# Altium PCB FrontV1.1.PcbDoc
Units mil, origin at the board's own origin, x right, y up, seen from the top; angles counter-clockwise.
Board outline 3149.61 x 3149.61 mil, 2 copper layers (Top Layer, Bottom Layer); 35 components, 39 nets, 152 pads, 15 vias.
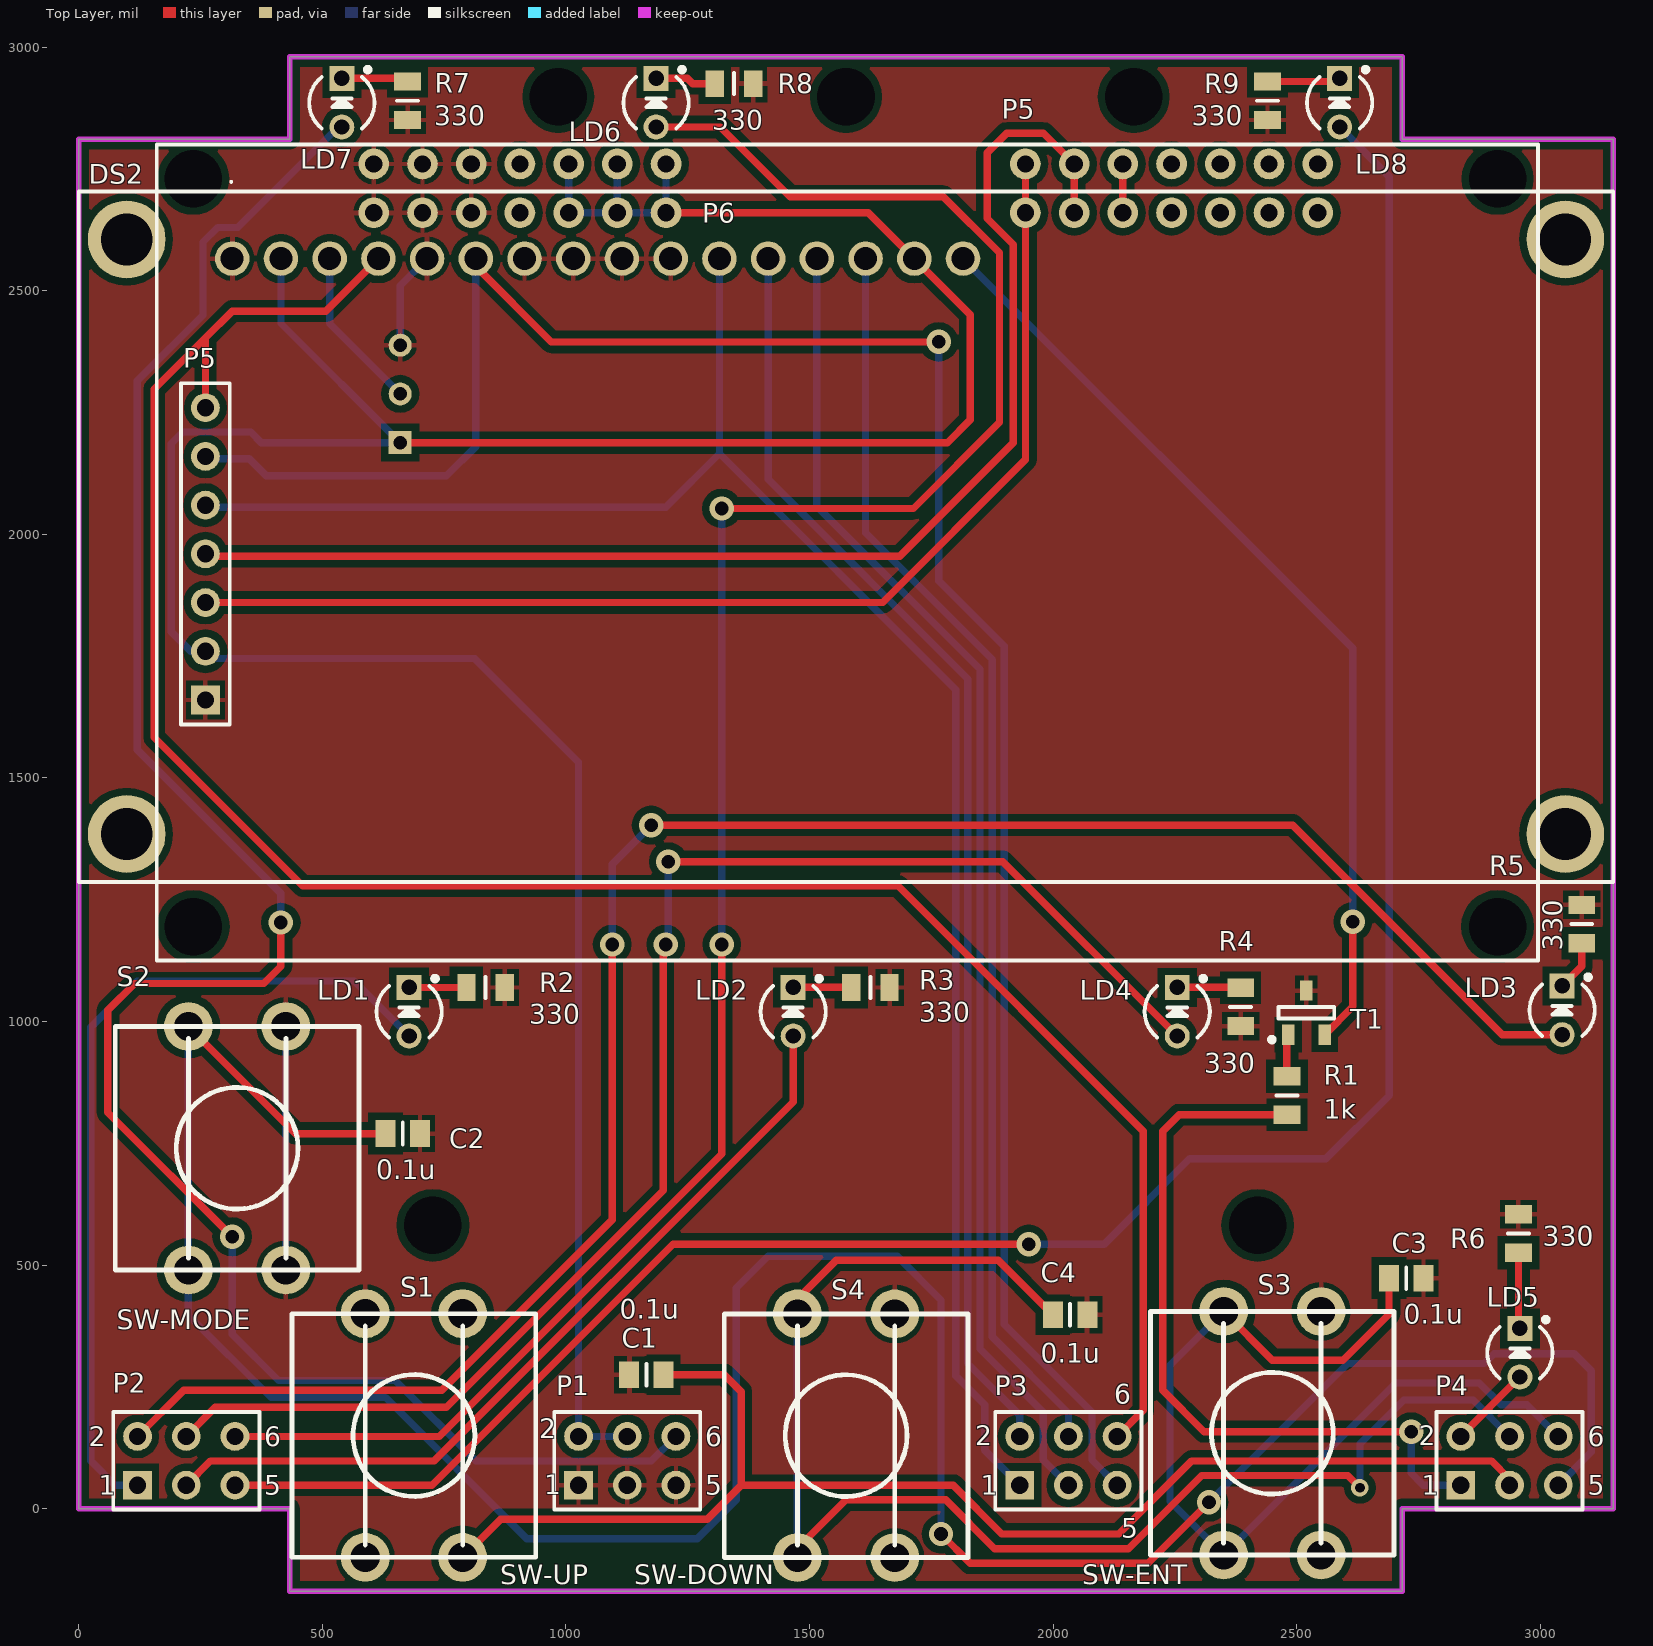
[diagram p0: Top Layer view]
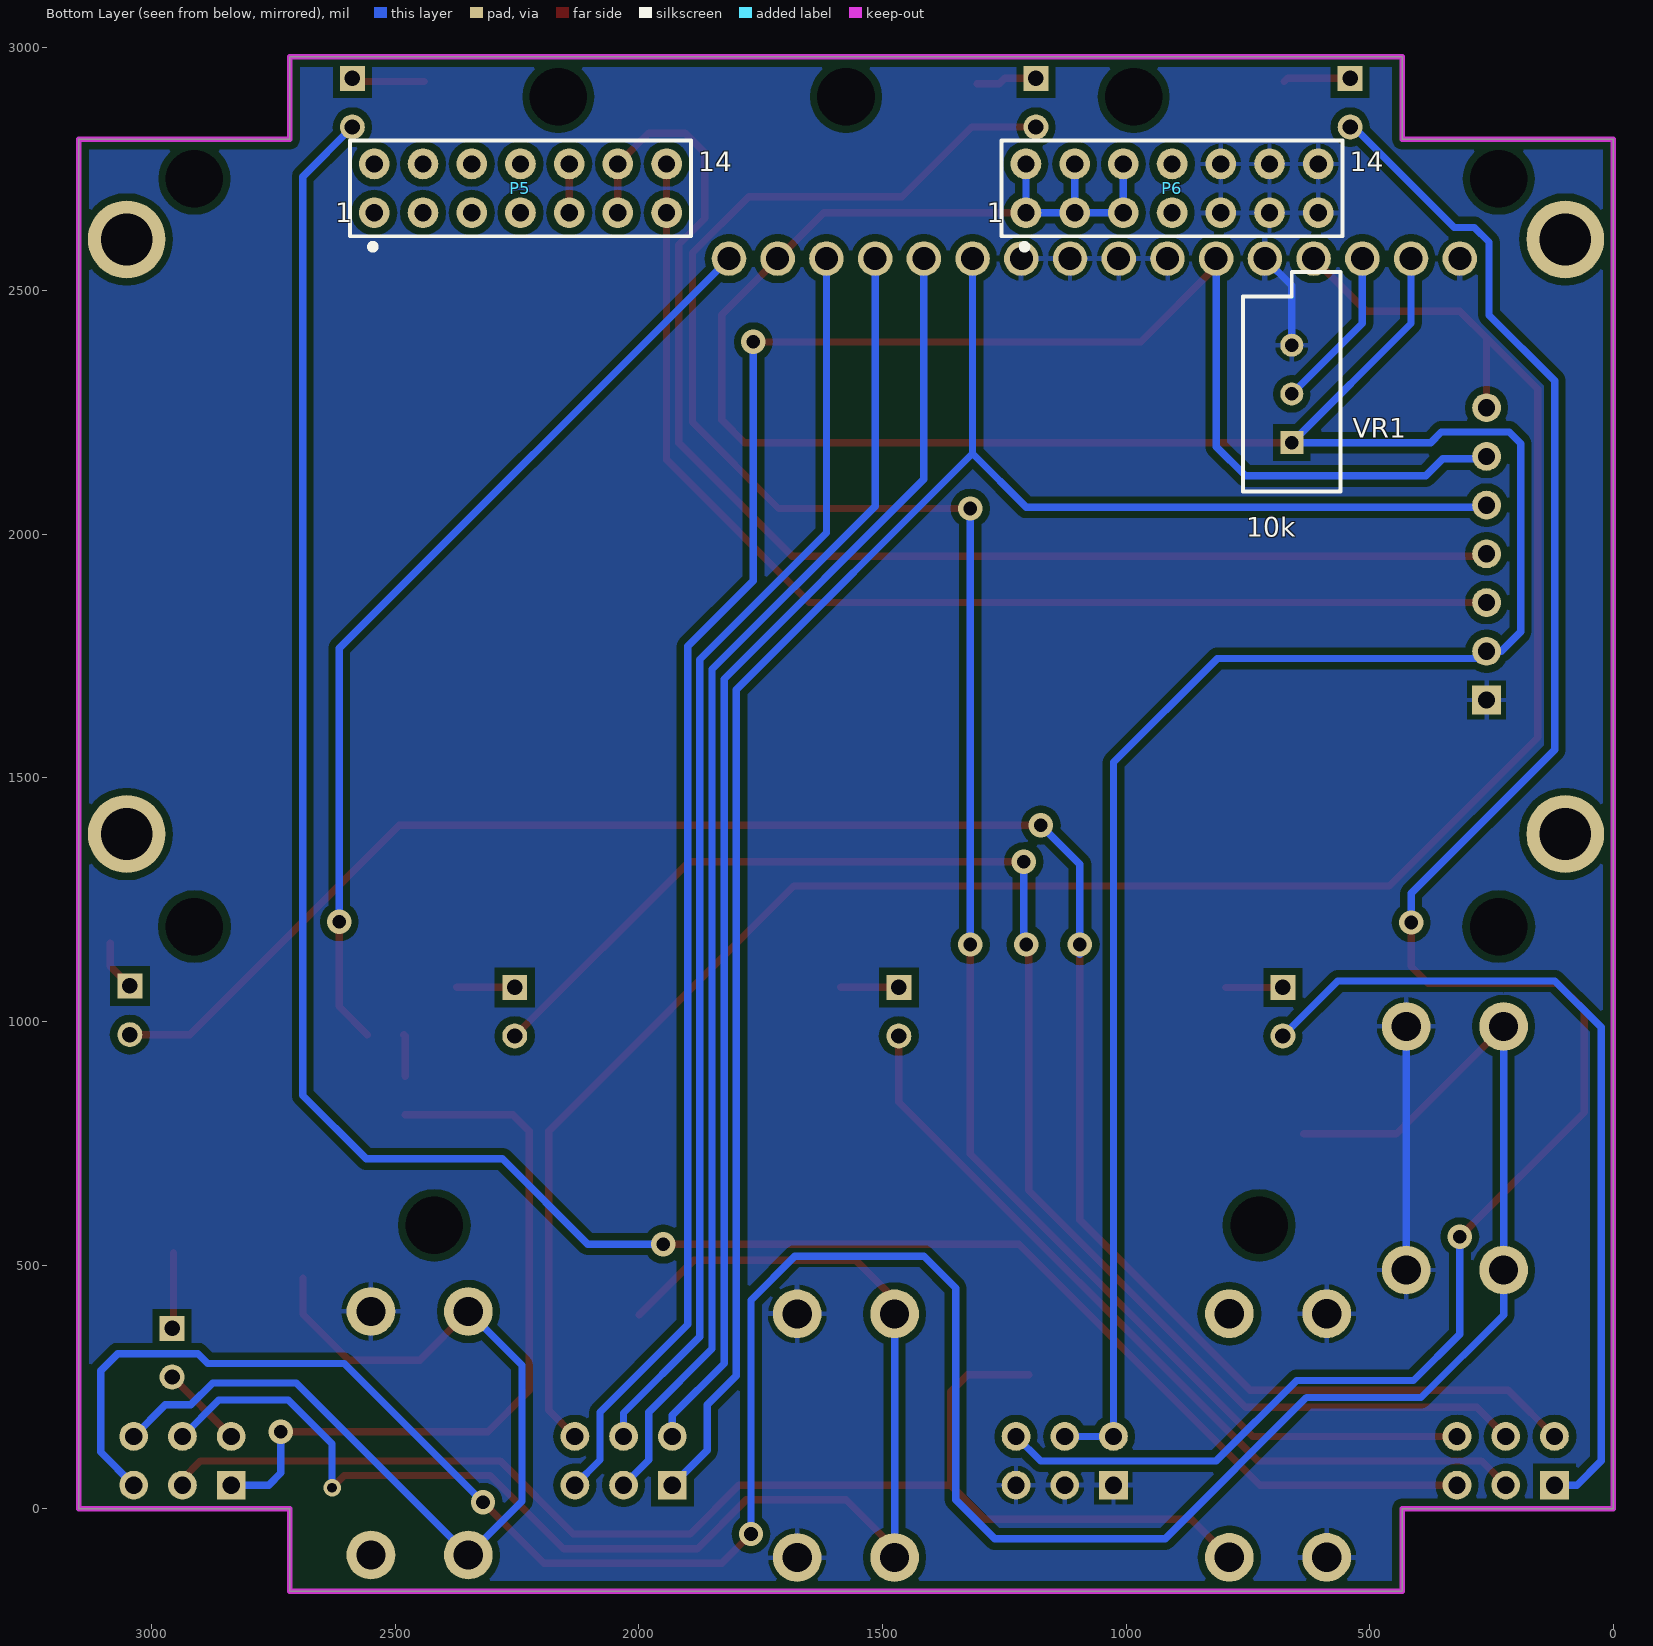
[diagram p1: Bottom Layer view, seen from below]
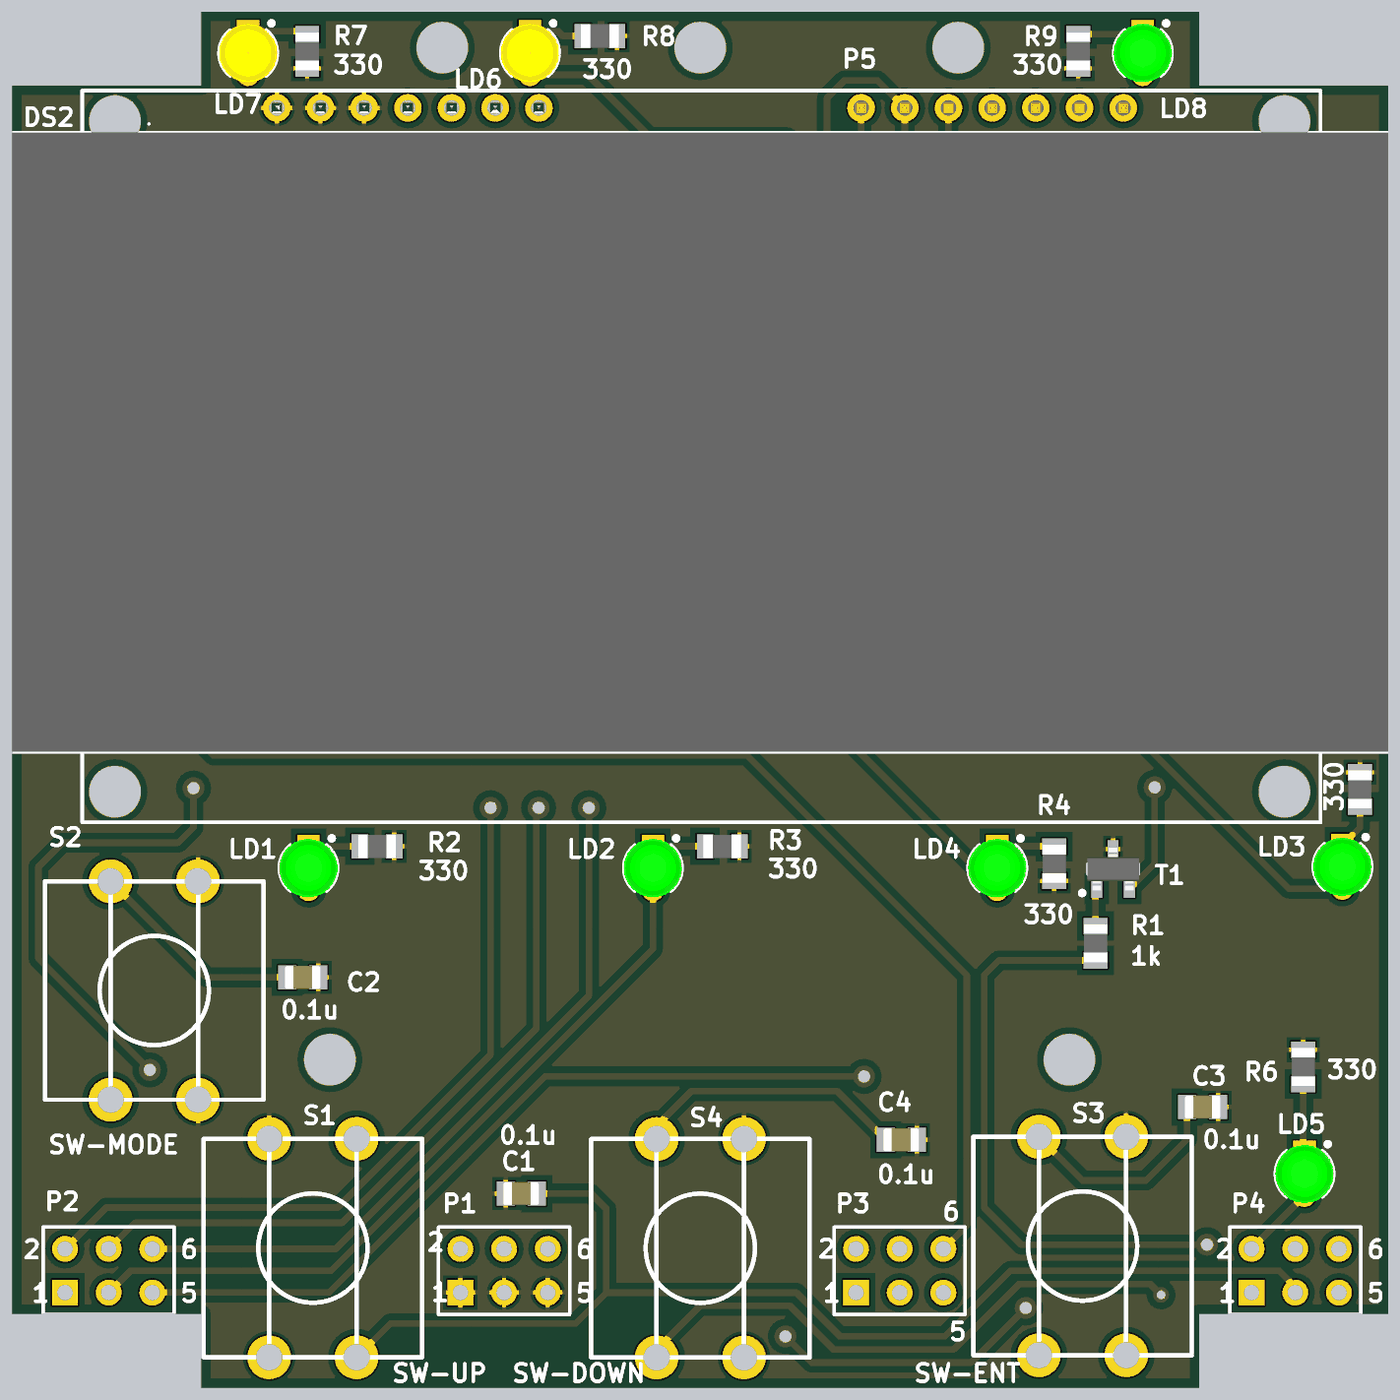
[diagram p2: 3D render of the assembled board from above, using the file's embedded part models]

## Layer stack, top to bottom
Top Solder: solder mask 0.4, Solder Resist, Dk 3.5
Top Layer: signal copper 1.4
Dielectric 1: dielectric 12.6, FR-4, Dk 4.8
Bottom Layer: signal copper 1.4
Bottom Solder: solder mask 0.4, Solder Resist, Dk 3.5

## Board outline
0,0 0,2811.02 433.07,2811.02 433.07,2980.31 2716.54,2980.31 2716.54,2811.02 3149.61,2811.02 3149.61,0 2716.54,0 2716.54,-169.29 433.07,-169.29 433.07,0

## Design rules (kind name [scope] priority, off if disabled: settings)
Clearance [All] p1: gap=10 ignorepadtopadclearanceinfootprint=FALSE
ComponentClearance [All] p1 off: gap=10 collisioncheckmode=3 verticalgap=10 showdistances=FALSE
PolygonConnect [All] p1: connectstyle=Relief reliefconductorwidth=10 reliefentries=4 polygonreliefangle="90 Angle" airgapwidth=10
RoutingVias [All] p1: holewidth=28 width=50 viastyle="Through Hole" minholewidth=28 minwidth=50 maxholewidth=28 maxwidth=50
SolderMaskExpansion [All] p1: expansion=4
Width [All] p1: maxlimit=300 minlimit=8 preferedwidth=10
29 further rules are at their usual default settings.

## Components (designator, comment, footprint, x,y, rotation, side; value= is the part's Value field where it differs from the comment)
C1 "0.1u" CAPC2012X135N 1165,275 r0 top value=100nF
C2 "0.1u" CAPC2012X135N 665,770 r180 top value=100nF
C3 "0.1u" CAPC2012X135N 2724.8,473.19 r180 top value=100nF
C4 "0.1u" CAPC2012X135N 2034.8,398.19 r180 top value=100nF
DS2 "HDM16216L-5-L30S" HDM16216L5L30S 315,2566.02 r0 top locked (schematic designator DS1)
LD1 "Green" LED_3MM_GREEN_1C-2A 678.07,1020.31 r270 top (schematic designator LD5)
LD2 "Green" LED_3MM_GREEN_1C-2A 1466.4,1020.31 r270 top
LD3 "Green" LED_3MM_GREEN_1C-2A 3044.8,1023.19 r270 top (schematic designator LD5)
LD4 "Green" LED_3MM_GREEN_1C-2A 2254.74,1020.31 r270 top
LD5 "Green" LED_3MM_GREEN_1C-2A 2958.07,320.31 r270 top
LD6 "Yellow" LED_3MM_YELLOW_1C-2A 1185,2886.02 r270 top
LD7 "Yellow" LED_3MM_YELLOW_1C-2A 540,2886.02 r270 top
LD8 "Green" LED_3MM_GREEN_1C-2A 2588.07,2886.02 r270 top (schematic designator LD5)
P1 "3X2" HDR2X3 1025.83,48.43 r0 top locked
P2 "3X2" HDR2X3 120.67,48.43 r0 top locked
P3 "3X2" HDR2X3 1931.34,48.43 r0 top locked
P4 "3X2" HDR2X3 2836.85,48.43 r0 top locked
P5 "7X2" COMATEL_389.0358.1.14.400 2243.07,2710.31 r180 bottom
P5 "Header 7" HDR1X7 260,1660 r90 top
P6 "7X2" COMATEL_389.0358.1.14.400 905.51,2710.31 r180 bottom
R1 "1k" RESC2012X60N 2479.8,848.19 r90 top
R2 "330" RESC2012X60N 835,1070 r0 top value=1k (schematic designator R1)
R3 "330" RESC2012X60N 1625,1070 r180 top value=1k (schematic designator R1)
R4 "330" RESC2012X60N 2385,1030 r90 top value=1k (schematic designator R1)
R5 "330" RESC2012X60N 3085,1200 r90 top value=1k (schematic designator R1)
R6 "330" RESC2012X60N 2955,565 r90 top value=1k (schematic designator R1)
R7 "330" RESC2012X60N 675,2890 r90 top value=1k (schematic designator R1)
R8 "330" RESC2012X60N 1345,2925 r180 top value=1k (schematic designator R1)
R9 "330" RESC2012X60N 2440,2890 r90 top value=1k (schematic designator R1)
S1 "SW-UP" SW_PB1 588.32,400.33 r270 top
S2 "SW-MODE" SW_PB1 424.75,489.99 r90 top
S3 "SW-ENT" SW_PB1 2549.75,-95.01 r90 top
S4 "SW-DOWN" SW_PB1 1674.75,-100.01 r90 top
T1 "MMBT3906LT1G" SOT95P240X110-3N 2519.8,1018.19 r90 top
VR1 "10k" VR5 659.8,2288.19 r90 bottom value=100k

## Footprints (in the part's own frame and the unit in brackets; to place one, negate y for a bottom-side part, rotate by r counter-clockwise, add the part's x,y. Pads: shape width x height; smd on the part's side, far side on the other; paste and mask are expansions set on the pad)
CAPC2012X135N [mm] "Chip Capacitor, Body 2.0x1.25mm, IPC Medium Density"
  rect 1.05x1.4 smd: 1(-0.9,0) 2(0.9,0)
  silkscreen extent 0,-0.58 0,0.58, body extent -1.05,-0.67 1.05,0.68, height 1.25
COMATEL_389.0358.1.14.400 [mm] "14 Contacts - Pitch 2.54mm - Dual Row Straight Strip Header - Insulator 1.7mm"
  round 1.6 hole 0.9: 1(-7.62,-1.27) 2(-7.62,1.27) 3(-5.08,-1.27) 4(-5.08,1.27) 5(-2.54,-1.27) 6(-2.54,1.27) 7(0,-1.27) 8(0,1.27) 9(2.54,-1.27) 10(2.54,1.27) 11(5.08,-1.27) 12(5.08,1.27) 13(7.62,-1.27) 14(7.62,1.27)
  silkscreen extent -8.89,-3.2 8.89,2.5, body extent -8.89,-3 8.89,2.5, height 8
HDM16216L5L30S [mm]
  round 1.8 hole 1.2: 1(0,0) 2(2.54,0) 3(5.08,0) 4(7.62,0) 5(10.16,0) 6(12.7,0) 7(15.24,0) 8(17.78,0) 9(20.32,0) 10(22.86,0) 11(25.4,0) 12(27.94,0) 13(30.48,0) 14(33.02,0) 15(35.56,0) 16(38.1,0)
  round 4.05 hole 2.7: MH1(-5.5,1) MH2(-5.5,-30) MH3(69.5,-30) MH4(69.5,1)
  silkscreen extent -8,-32.5 72,4.05, body extent -8,-32.5 72,3.5, height 14.6
HDR1X7 [mm] "Connector; Header; 7 Position"
  rect 1.5x1.5 hole 0.9: 1(0,0)
  round 1.5 hole 0.9: 2(2.54,0) 3(5.08,0) 4(7.62,0) 5(10.16,0) 6(12.7,0) 7(15.24,0)
  silkscreen extent -1.27,-1.27 16.51,1.27
HDR2X3 [mm] "Connector; Header; 3x2 Position"
  rect 1.5x1.5 hole 0.9: 1(0,0)
  round 1.5 hole 0.9: 2(0,2.54) 3(2.54,0) 4(2.54,2.54) 5(5.08,0) 6(5.08,2.54)
  silkscreen extent -1.27,-1.27 6.35,3.81
LED_3MM_GREEN_1C-2A [mm] "LED, Green, Body Dia. 3.43 mm, Pin spacing 2.54mm"
  rect 1.3x1.3 hole 0.8: 1(-1.27,0)
  round 1.3 hole 0.8: 2(1.27,0)
  silkscreen extent -1.85,-1.7 1.34,1.7, body extent -1.71,-1.71 1.72,1.72, height 9.85
LED_3MM_YELLOW_1C-2A [mm] "LED, Red, Body Dia. 3.43 mm, Pin spacing 2.54mm"
  rect 1.3x1.3 hole 0.8: 1(-1.27,0)
  round 1.3 hole 0.8: 2(1.27,0)
  silkscreen extent -1.85,-1.7 1.34,1.7, body extent -1.71,-1.71 1.72,1.72, height 9.85
RESC2012X60N [mm] "Chip Resistor, EIA 0805, Metric 2012, Body 2.0x1.2mm, IPC Medium Density"
  rect 0.95x1.4 smd: 1(-1,0) 2(1,0)
  silkscreen extent 0,-0.55 0,0.55, body extent -1.1,-0.67 1.1,0.68, height 0.6
SOT95P240X110-3N [mm] "SOT23 3-Leads, Pitch 0.95mm - Body 1.3x2.9mm, IPC Medium Density"
  rect 1.05x0.65 smd: 1(-1.15,0.95) 2(-1.15,-0.95) 3(1.15,0)
  silkscreen extent -1.52,-1.45 0.3,1.92, body extent -1.25,-1.5 1.25,1.5, height 1.1
SW_PB1 [mil]
  round 100 hole 60: 1(0.01,-0.25) 1(500.01,-0.25) 2(0.01,199.75) 2(500.01,199.75)
  silkscreen extent 0,-150 500,350
VR5 [mm] "Thru-Hole; 3 Leads"
  rect 1.2x1.2 hole 0.7: 1(-2.54,0)
  round 1.2 hole 0.7: 2(0,0) 3(2.54,0)
  silkscreen extent -5.08,-2.54 6.35,2.54

## Part data
C1 C2 C3 C4: library part CC0805_100NF_50V_10%_X7R, "0092-0004-8", Case=0805, Manufacturer=GENERIC, Manufacturer1 ComponentHeight=1.35mm, Manufacturer1 Example=EPCOS, Manufacturer1 Part Number=B37941K5104K62, Tolerance=±10%, Voltage=50V, Author="CERN DEM JLC", Component Type=Standard, CreateDate=3/12/2550, HelpURL=\\cern.ch\dfs\Applications\Altium\Datasheets\CC0805_X7R_EPCOS.pdf, LatestRevisionDate=3/12/2550, Manufacturer Part Number=CC0805_100NF_50V_10%_X7R, Mounted=Yes, Part Description="SMD Multilayer Chip Ceramic Capacitor", Part Number=CC0805_100NF_50V_10%_X7R, Pin Count=2, SMD=Yes, Socket=No, Status=Preferred, Table="Capacitors SMD", TC=X7R
DS2: "Display", Manufacturer_Name=Hantronix, Datasheet Link=https://componentsearchengine.com//HDM16216L-5-L30S.pdf, Height=14.5mm, Manufacturer_Part_Number=HDM16216L-5-L30S, Mouser Part Number=HDM16216L-5-L30S, Mouser Price/Stock=https://www.mouser.co.uk/ProductDetail/Hantronix/HDM16216L-5-L30S?qs=NSR9MB9Qqxa1fDGN5rUO%252Bw%3D%3D
LD1 LD2 LD3 LD4 LD5 LD8: library part LED_AVAGO_HLMP-1790, "LED Green 1C 2A", Manufacturer="AVAGO TECHNOLOGIES", Manufacturer Part Number=HLMP-1790, Author="CERN DEM JLC", Color=Green, ComponentHeight=6.35mm(min), Component Type=Standard, CreateDate=12/6/2551, HelpURL=\\cern.ch\dfs\Applications\Altium\Datasheets\LED_AVAGO_HLMP-1790.pdf, LatestRevisionDate=17/3/2553, Mounted=Yes, PackageDescription="LED, Green, Body Dia. 3.43 mm, Pin spacing 2.54mm", Part Description="3mm Green LED", Part Number=LED_AVAGO_HLMP-1790, Pin Count=2, SMD=No, Socket=No, Table="LEDs & Displays"
LD6 LD7: library part LED_AVAGO_HLMP-1719, "LED Yellow 1C 2A", Manufacturer="AVAGO TECHNOLOGIES", Manufacturer Part Number=HLMP-1719, Author="CERN DEM JLC", Color=Yellow, ComponentHeight=6.35mm(min), Component Type=Standard, CreateDate=12/6/2551, HelpURL=\\cern.ch\dfs\Applications\Altium\Datasheets\LED_AVAGO_HLMP-1719.pdf, LatestRevisionDate=17/3/2553, Mounted=Yes, PackageDescription="LED, Yellow, Body Dia. 3.43 mm, Pin spacing 2.54mm", Part Description="3mm Yellow LED", Part Number=LED_AVAGO_HLMP-1719, Pin Count=2, SMD=No, Socket=No, Table="LEDs & Displays"
P1 P2 P3 P4: library part "Header 3X2", "Header, 3-Pin, Dual row", LatestRevisionDate=17-Jul-2002, LatestRevisionNote="Re-released for DXP Platform.", Publisher="Altium Limited"
P5 P6: library part COMATEL_389.0358.1.14.400
P5: "Header, 7-Pin", LatestRevisionDate=17-Jul-2002, LatestRevisionNote="Re-released for DXP Platform.", Publisher="Altium Limited"
R1 R2 R3 R4 R5 R6 R7 R8 R9: library part R0805_1K_1%_0.125W_100PPM, "Resistor - 1%", Case=0805, Manufacturer=GENERIC, Manufacturer1 ComponentHeight=0.6mm, Manufacturer1 Example="NIC COMPONENT", Manufacturer1 Part Number=NRC10F1001TRF, Power=0.125W, Tolerance=±1%, Author="CERN DEM JLC", Component Type=Standard, CreateDate=3/12/2550, HelpURL=\\cern.ch\dfs\Applications\Altium\Datasheets\R0805_NIC_NRC.pdf, LatestRevisionDate=13/3/2551, Manufacturer Part Number=R0805_1K_1%_0.125W_100PPM, Mounted=Yes, Part Description="General Purpose Thick Film Chip Resistor", Part Number=R0805_1K_1%_0.125W_100PPM, Pin Count=2, SMD=Yes, Socket=No, Status=Preferred, Table="Resistors SMD", TC=±100ppm/°C
S1 S2 S3 S4: library part SW-PB, "Switch", LatestRevisionDate=17-Jul-2002, LatestRevisionNote="Re-released for DXP Platform.", PackageDescription="Switch; 2 Leads", PackageReference=SPST-2, Published=24-Mar-1999, Publisher="Altium Limited"
T1: library part BSR18A, "0235-0223-4", Case=SOT23-3, Manufacturer="FAIRCHILD SEMICONDUCTOR", Author="CERN DEM JLC", ComponentHeight=1.3mm, Component Type=Standard, CreateDate=15/5/2551, Device=BSR18A, HelpURL=\\cern.ch\dfs\Applications\Altium\Datasheets\BSR18A.pdf, LatestRevisionDate=15/5/2551, Manufacturer Part Number=BSR18A, Mounted=Yes, PackageDescription="SOT23 3-Leads, Pitch 0.95mm - Body 1.4x3mm, IPC Medium Density", Part Description="40V 200mA PNP General-Purpose Amplifier", Part Number=BSR18A, Pin Count=3, SMD=Yes, Socket=No, Table=Transistors
VR1: library part TRIM_12T_100K_BOURNS_3266W-1-104LF, "0141-0259-5", Case=3266W, Manufacturer=BOURNS, Manufacturer Part Number=3266W-1-104LF, Power=0.25W, Tolerance=?10%, Author="CERN DEM JLC", ComponentHeight=7.75mm, Component Type=Standard, CreateDate=10/6/2551, HelpURL=\\cern.ch\dfs\Applications\Altium\Datasheets\TRIM_BOURNS_3266W.pdf, LatestRevisionDate=28/11/2555, Mounted=Yes, Part Description="12 Turn Trimming Potentiometer (Top Adjustement)", Part Number=TRIM_12T_100K_BOURNS_3266W-1-104LF, Pin Count=3, SMD=No, Socket=No, Table="Potentiometers THD", TC=?100ppm/?C

## Free pads (board coordinates)
  round 60 hole 118.11: 0(235,1195) 0(235,2730) 0(727,581.71) 0(984.25,2898.19) 0(1574.8,2898.19) 0(2165.35,2898.19) 0(2419.91,581.71) 0(2912.17,1195) 0(2912.17,2730)

## Via types
v1: diameter 50, hole 28, Top Layer to Bottom Layer, tented both sides, 14 vias
v2: diameter 36, hole 20, Top Layer to Bottom Layer, tented both sides, 1 vias

## Nets (pads, with @x,y where several pads share a name; then routed paths per layer and width w, separated by ;. In a path a pad name is that pad's centre, name@x,y a point inside that pad or via, vN(x,y) a via of type N, cw(c..) or ccw(c..) an arc to the next point about the centre after c; other vN are vias at no path point)
Btn_DW: C3.2 P4.6 S3.2 | length 1963.6
  Top Layer w15: S3.2@2350,405 2450,305 2595,305 2689.37,399.37 C3.2
  Bottom Layer w15: S3.2@2350,405 2239.8,294.8 2239.8,15.2 2350,-95 2703.19,258.19 2874.8,258.19 2919.8,213.19 2972.09,213.19 P4.6
Btn_EN: C1.2 P4.3 S1.2@788.07,-99.69 | length 2707.9
  Top Layer w15: S1.2@788.07,-99.69 865.94,-21.81 1289.8,-21.81 1359.8,48.19 ; C1.2@1200,275 C1.2 1325,275 1359.8,240.2 1359.8,48.19 ; P4.3 2936.85,61.14 2899.8,98.19 2284.8,98.19 2134.8,-51.81 1894.8,-51.81 1794.8,48.19 1359.8,48.19
Btn_UP: C2.2 P4.5 S2.2 | length 5656.3
  Top Layer w15: S2.2@225,990 445,770 634.57,770 C2.2@635,770 ; v1(1769.8,-51.81) 1829.8,-111.81 2194.8,-111.81 v1(2319.8,13.19)
  Bottom Layer w15: S2.2@225,990 225,490 225,397.63 394.45,228.19 629.8,228.19 919.8,-61.81 1269.8,-61.81 1349.8,18.19 1349.8,453.19 1414.8,518.19 1679.8,518.19 1769.8,428.19 v1(1769.8,-51.81) ; v1(2319.8,13.19) 2604.8,298.19 2884.8,298.19 2904.8,318.19 3069.8,318.19 3104.8,283.19 3104.8,116.38 P4.5
CLK_S1: P5.3@260,1860 P5.13 P5.14 | length 2406.7
  Top Layer w15: P5.3@265,1860 1650,1860 1943.07,2153.07 P5.13 P5.14
D3.3V: DS2.2 DS2.15 P1.2 P1.4 P5.2@260,1760 P6.1 P6.2 P6.3 P6.4 P6.5 P6.6 VR1.1 | length 6401.7
  Top Layer w15: VR1.1 1783.19,2188.19 1830,2235 1830,2451.02 DS2.15 1620.71,2660.31 P6.1
  Bottom Layer w15: DS2.2 415,2432.99 VR1.1 374.8,2188.19 352.99,2210 213.39,2210 190,2186.61 190,1800 230,1760 255,1760 270,1745 812.99,1745 1025.83,1532.16 P1.2 P1.4 ; P6.6 P6.5 P6.3 ; P6.4 P6.3 ; P6.2 P6.1 P6.3
GND: C1.1 C2.1 C3.1 C4.1 DS2.1 DS2.5 DS2.7 DS2.8 DS2.9 DS2.10 P1.1 P1.3 P1.5 P5.1@260,1660 P6.9 P6.10 P6.11 P6.12 P6.13 P6.14 R2.2 R3.1 R4.1 R5.2 R6.2 R7.1 R8.1 R9.1 S1.1 S2.1 S3.1@2550,405 S4.1 T1.3 VR1.3 | length 700.7
  Bottom Layer w15: S2.1@425,490 S2.1@425,990 ; VR1.3 659.8,2510.83 DS2.5
LCD_BL: P4.1 R1.1 | length 1543.1
  Top Layer w15: R1.1 2258.82,808.82 2225,775 2225,242.99 2309.8,158.19 v1(2734.8,158.19)
  Bottom Layer w15: v1(2734.8,158.19) 2734.8,73.19 2759.57,48.43 P4.1
LCD_D1: DS2.11 P3.1 P5.5@260,2060 | length 3873.6
  Bottom Layer w15: P5.5@260,2055.63 1204.61,2055.63 1315,2166.02 ; DS2.11 1315,2166.02 ; P3.1 1859.8,119.96 1859.8,213.19 1799.8,273.19 1799.8,1681.22 1315,2166.02
LCD_D2: DS2.12 P3.2 | length 2631.5
  Bottom Layer w15: DS2.12 1415,2112.99 1824.8,1703.19 1824.8,298.19 1931.34,191.65 P3.2
LCD_D3: DS2.13 P3.3 | length 2731.5
  Bottom Layer w15: DS2.13 1515,2057.99 1849.8,1723.19 1849.8,328.19 1979.8,198.19 1979.8,99.96 P3.3
LCD_D4: DS2.14 P3.4 | length 2590.1
  Bottom Layer w15: DS2.14 1615,2002.99 1874.8,1743.19 1874.8,353.19 2031.34,196.65 P3.4
LCD_E: DS2.6 P3.5 P5.6@260,2160 | length 4508.9
  Top Layer w15: DS2.6 815,2550 970,2395 v1(1765,2395)
  Bottom Layer w15: P5.6@260,2155 350,2155 385,2120 755,2120 815,2180 DS2.6 ; v1(1765,2395) 1765,1905 1899.8,1770.2 1899.8,378.19 2079.8,198.19 2079.8,99.96 P3.5
LCD_RS: DS2.4 P3.6 P5.7@260,2260 | length 4447.7
  Top Layer w15: P5.7@260,2255.63 260,2403.39 ; DS2.4 507.16,2458.19 314.8,2458.19 260,2403.39 ; P3.6 2185,202.09 2185,775 1681.81,1278.19 459.8,1278.19 154.8,1583.19 154.8,2298.19 260,2403.39
LED_AUTO: LD6.2 P2.6 | length 4367.2
  Top Layer w15: P2.6 740.04,148.43 1319.8,728.19 v1(1319.8,1158.19) ; LD6.2 1316.97,2836.02 1459.8,2693.19 1774.45,2693.19 1889.8,2577.83 1889.8,2229.8 1713.19,2053.19 v1(1319.8,2053.19)
  Bottom Layer w15: v1(1319.8,1158.19) v1(1319.8,2053.19)
LED_Fault: LD8.2 P2.5 | length 4730.4
  Top Layer w15: P2.5 725.04,48.43 1219.8,543.19 v1(1949.8,543.19)
  Bottom Layer w15: v1(1949.8,543.19) 2104.8,543.19 2279.8,718.19 2559.8,718.19 2689.8,848.19 2689.8,1278.19 2689.8,2734.29 LD8.2
LED_Healty: LD5.2 P4.2 | length 172.1
  Top Layer w15: P4.2 2836.85,149.09 LD5.2
LED_MANUAL: LD7.2 P1.6 | length 4250
  Top Layer w15: v1(314.8,558.19) 59.8,813.19 59.8,1023.19 114.8,1078.19 379.8,1078.19 414.8,1113.19 v1(414.8,1203.19)
  Bottom Layer w15: v1(314.8,558.19) 314.8,358.19 409.8,263.19 649.8,263.19 814.8,98.19 1175.59,98.19 P1.6 ; v1(414.8,1203.19) 414.8,1263.19 120,1557.99 120,2315 255,2450 255,2600 285,2630 326.61,2630 532.64,2836.02 LD7.2
LED_OUT1: LD2.2 P2.3 | length 1707
  Top Layer w15: P2.3 270.43,98.19 729.8,98.19 1466.4,834.79 LD2.2
LED_OUT2: LD4.2 P2.4 | length 3081.7
  Top Layer w15: P2.4 280.43,208.19 754.8,208.19 1199.8,653.19 v1@1199.8,1158.19 ; v1(1209.8,1328.19) 1896.86,1328.19 LD4.2
  Bottom Layer w15: v1@1204.8,1143.19 1209.8,1148.19 1199.8,1158.19 1209.8,1168.19 v1(1209.8,1328.19)
  other v1: 1204.8,1158.19
LED_S1: LD1.2 P2.1 | length 1745.9
  Bottom Layer w15: P2.1 74.57,48.43 24.8,98.19 24.8,988.19 119.8,1083.19 565.2,1083.19 LD1.2
LED_S2: LD3.2 P2.2 | length 4069.6
  Top Layer w15: P2.2 215.43,243.19 744.8,243.19 1094.8,593.19 v1(1094.8,1158.19) ; v1(1174.8,1403.19) 2491.81,1403.19 2921.81,973.19 LD3.2
  Bottom Layer w15: v1@1094.8,1138.19 v1(1094.8,1158.19) 1094.8,1323.19 v1(1174.8,1403.19)
man_auto: C4.2 P4.4 S4.2 | length 2927.6
  Top Layer w15: S4.2@1475,-100 1475,-81.61 1574.8,18.19 1779.8,18.19 1879.8,-81.81 2154.8,-81.81 2304.8,68.19 2604.8,68.19 v2(2629.8,43.19) ; S4.2@1475,400 1475,430 1555,510 1887.56,510 C4.2
  Bottom Layer w15: S4.2@1475,-100 S4.2@1475,400 ; v2(2629.8,43.19) 2629.8,133.19 2719.8,223.19 2862.09,223.19 P4.4
MISO_S1: P5.9 P5.10 | length 100
  Top Layer w15: P5.9 P5.10
MOSI_S1: P5.4@260,1960 P5.11 P5.12 | length 2692.7
  Top Layer w15: P5.4@260,1955 1685,1955 1918.07,2188.07 1918.07,2594.92 1864.8,2648.19 1864.8,2783.19 1904.8,2823.19 1980.2,2823.19 P5.12 P5.11
NetC1_2: 
NetC2_2: 
NetC3_2: 
NetC4_2: 
NetDS1_3: DS2.3 VR1.2 | length 337.8
  Bottom Layer w15: DS2.3 515,2432.99 VR1.2
NetDS1_16: DS2.16 T1.2 | length 1948.4
  Top Layer w15: T1.2 2615,1030.71 v1(2615,1205)
  Bottom Layer w15: DS2.16 2615,1766.02 v1(2615,1205)
NetR1_2: R1.2 T1.1 | length 86.4
  Top Layer w15: R1.2 2479.8,970.31 T1.1
R-LED1: LD1.1 R2.1 | length 117.7
  Top Layer w15: LD1.1 678.38,1070 R2.1
R-LED2: LD2.1 R3.2 | length 119.4
  Top Layer w15: LD2.1 1585.32,1070.31 R3.2
R-LED3: LD3.1 R5.1 | length 104.1
  Top Layer w15: LD3.1 3085,1113.39 R5.1
R-LED4: LD4.1 R4.2 | length 119.3
  Top Layer w15: LD4.1 R4.2@2374.06,1070.31
R-LED5: LD5.1 R6.1 | length 156.6
  Top Layer w15: R6.1 2955,373.38 LD5.1
R-LED6: LD6.1 R8.2 | length 125.2
  Top Layer w15: LD6.1 1248.98,2936.02 1260,2925 R8.2
R-LED7: LD7.1 R7.2 | length 137.8
  Top Layer w15: LD7.1 668.35,2936.02 R7.2
R-LED8: LD8.1 R9.2 | length 150.8
  Top Layer w15: R9.2 2581.42,2929.37 LD8.1
pads on no net: DS2.MH1 DS2.MH2 DS2.MH3 DS2.MH4 P5.1@2543.07,2660.31 P5.2@2543.07,2760.31 P5.3@2443.07,2660.31 P5.4@2443.07,2760.31 P5.5@2343.07,2660.31 P5.6@2343.07,2760.31 P5.7@2243.07,2660.31 P5.8 P6.7 P6.8 S1.2@788.07,400.31 S3.1@2550,-95

## Polygon pours and split planes (outlines as drawn)
GND on Top Layer "-" (solid, remove dead copper, pour order 18): 433.07,2980.31 2716.54,2980.31 2716.54,2810 3150,2810 3150,5 2710,5 2710,-170 435,-170 435,0 0,0 0,2811.02 433.07,2811.02
GND on Top Layer "Top Layer-GND 2" (solid, pour order 14): 445,2975
GND on Top Layer "Top Layer-GND 1" (solid, pour order 2): 445,2975
GND on Bottom Layer "-" (solid, remove dead copper, pour order 16): 433.07,2980.31 2716.54,2980.31 2716.54,2811.02 3149.61,2811.02 3149.61,0 2715,0 2715,-169.29 435,-169.29 435,0 0,0 0,2811.02 433.07,2811.02

## Keep-outs
Keep-Out Layer:
  the board outline again, w12.01

## Silkscreen, mask and mechanical layers (free items; w line width, h text height)
Top Overlay:
  lines w8: 160,1125 160,2800 2995,2800 2995,1125 160,1125
Mechanical 8:
  lines w8: 1573.07,-239.69 1573.07,2978.58 1574.8,2980.31

## Dimensions
260,1960 to 235,2730 on Mechanical 1
260,1960 to 235,1195 on Mechanical 1
260,2260 to 235,2730 on Mechanical 1
260,1660 to 235,1195 on Mechanical 1
235,2730 to 2912.17,2730 on Mechanical 1
235,2730 to 235,1195 on Mechanical 1
2716.54,2811.02 to 2716.54,2980.31 on Mechanical 1
235,2730 to 2912.17,2730 on Mechanical 1
2995,2800 to 2995,1125 on Mechanical 14
160,2800 to 2995,2800 on Mechanical 14
0,2811.02 to 260,2260 on Mechanical 1
905.51,2760.31 to 433.07,2980.31 on Mechanical 1
433.07,2811.02 to 2716.54,2811.02 on Mechanical 1
0,2811.02 to 3149.61,2811.02 on Mechanical 1

## Text inside footprints (layer, text, board x,y; h text height)
P1: Top Overlay "6" at 1285.83,128.43 h40; Top Overlay "5" at 1285.83,28.43 h40; Top Overlay "2" at 945,145 h40; Top Overlay "1" at 955,30 h40
P2: Top Overlay "6" at 380.67,128.43 h40; Top Overlay "5" at 380.67,28.43 h40; Top Overlay "2" at 20.67,128.43 h40; Top Overlay "1" at 40.67,28.43 h40
P3: Top Overlay "6" at 2125,215 h40; Top Overlay "5" at 2140,-60 h40; Top Overlay "2" at 1840,130 h40; Top Overlay "1" at 1851.34,28.43 h40
P4: Top Overlay "6" at 3096.85,128.43 h40; Top Overlay "5" at 3096.85,28.43 h40; Top Overlay "2" at 2750,130 h40; Top Overlay "1" at 2756.85,28.43 h40
P5: Bottom Overlay "14" at 1878.07,2745.31 h40; Bottom Overlay "1" at 2623.07,2640.31 h40
P6: Bottom Overlay "1" at 1285.51,2640.31 h40; Bottom Overlay "14" at 540.51,2745.31 h40